# Altium PCB Routed BOARD 3.pcbdoc (part 5 of 7)
Units mil, origin at the board's own origin, x right, y up, seen from the top; angles counter-clockwise.
Board outline 6225 x 7025 mil, 8 copper layers (TopLayer, MidLayer1, MidLayer2, MidLayer3, MidLayer4, MidLayer5, MidLayer6, BottomLayer); 253 components, 548 nets, 2588 pads, 2014 vias.
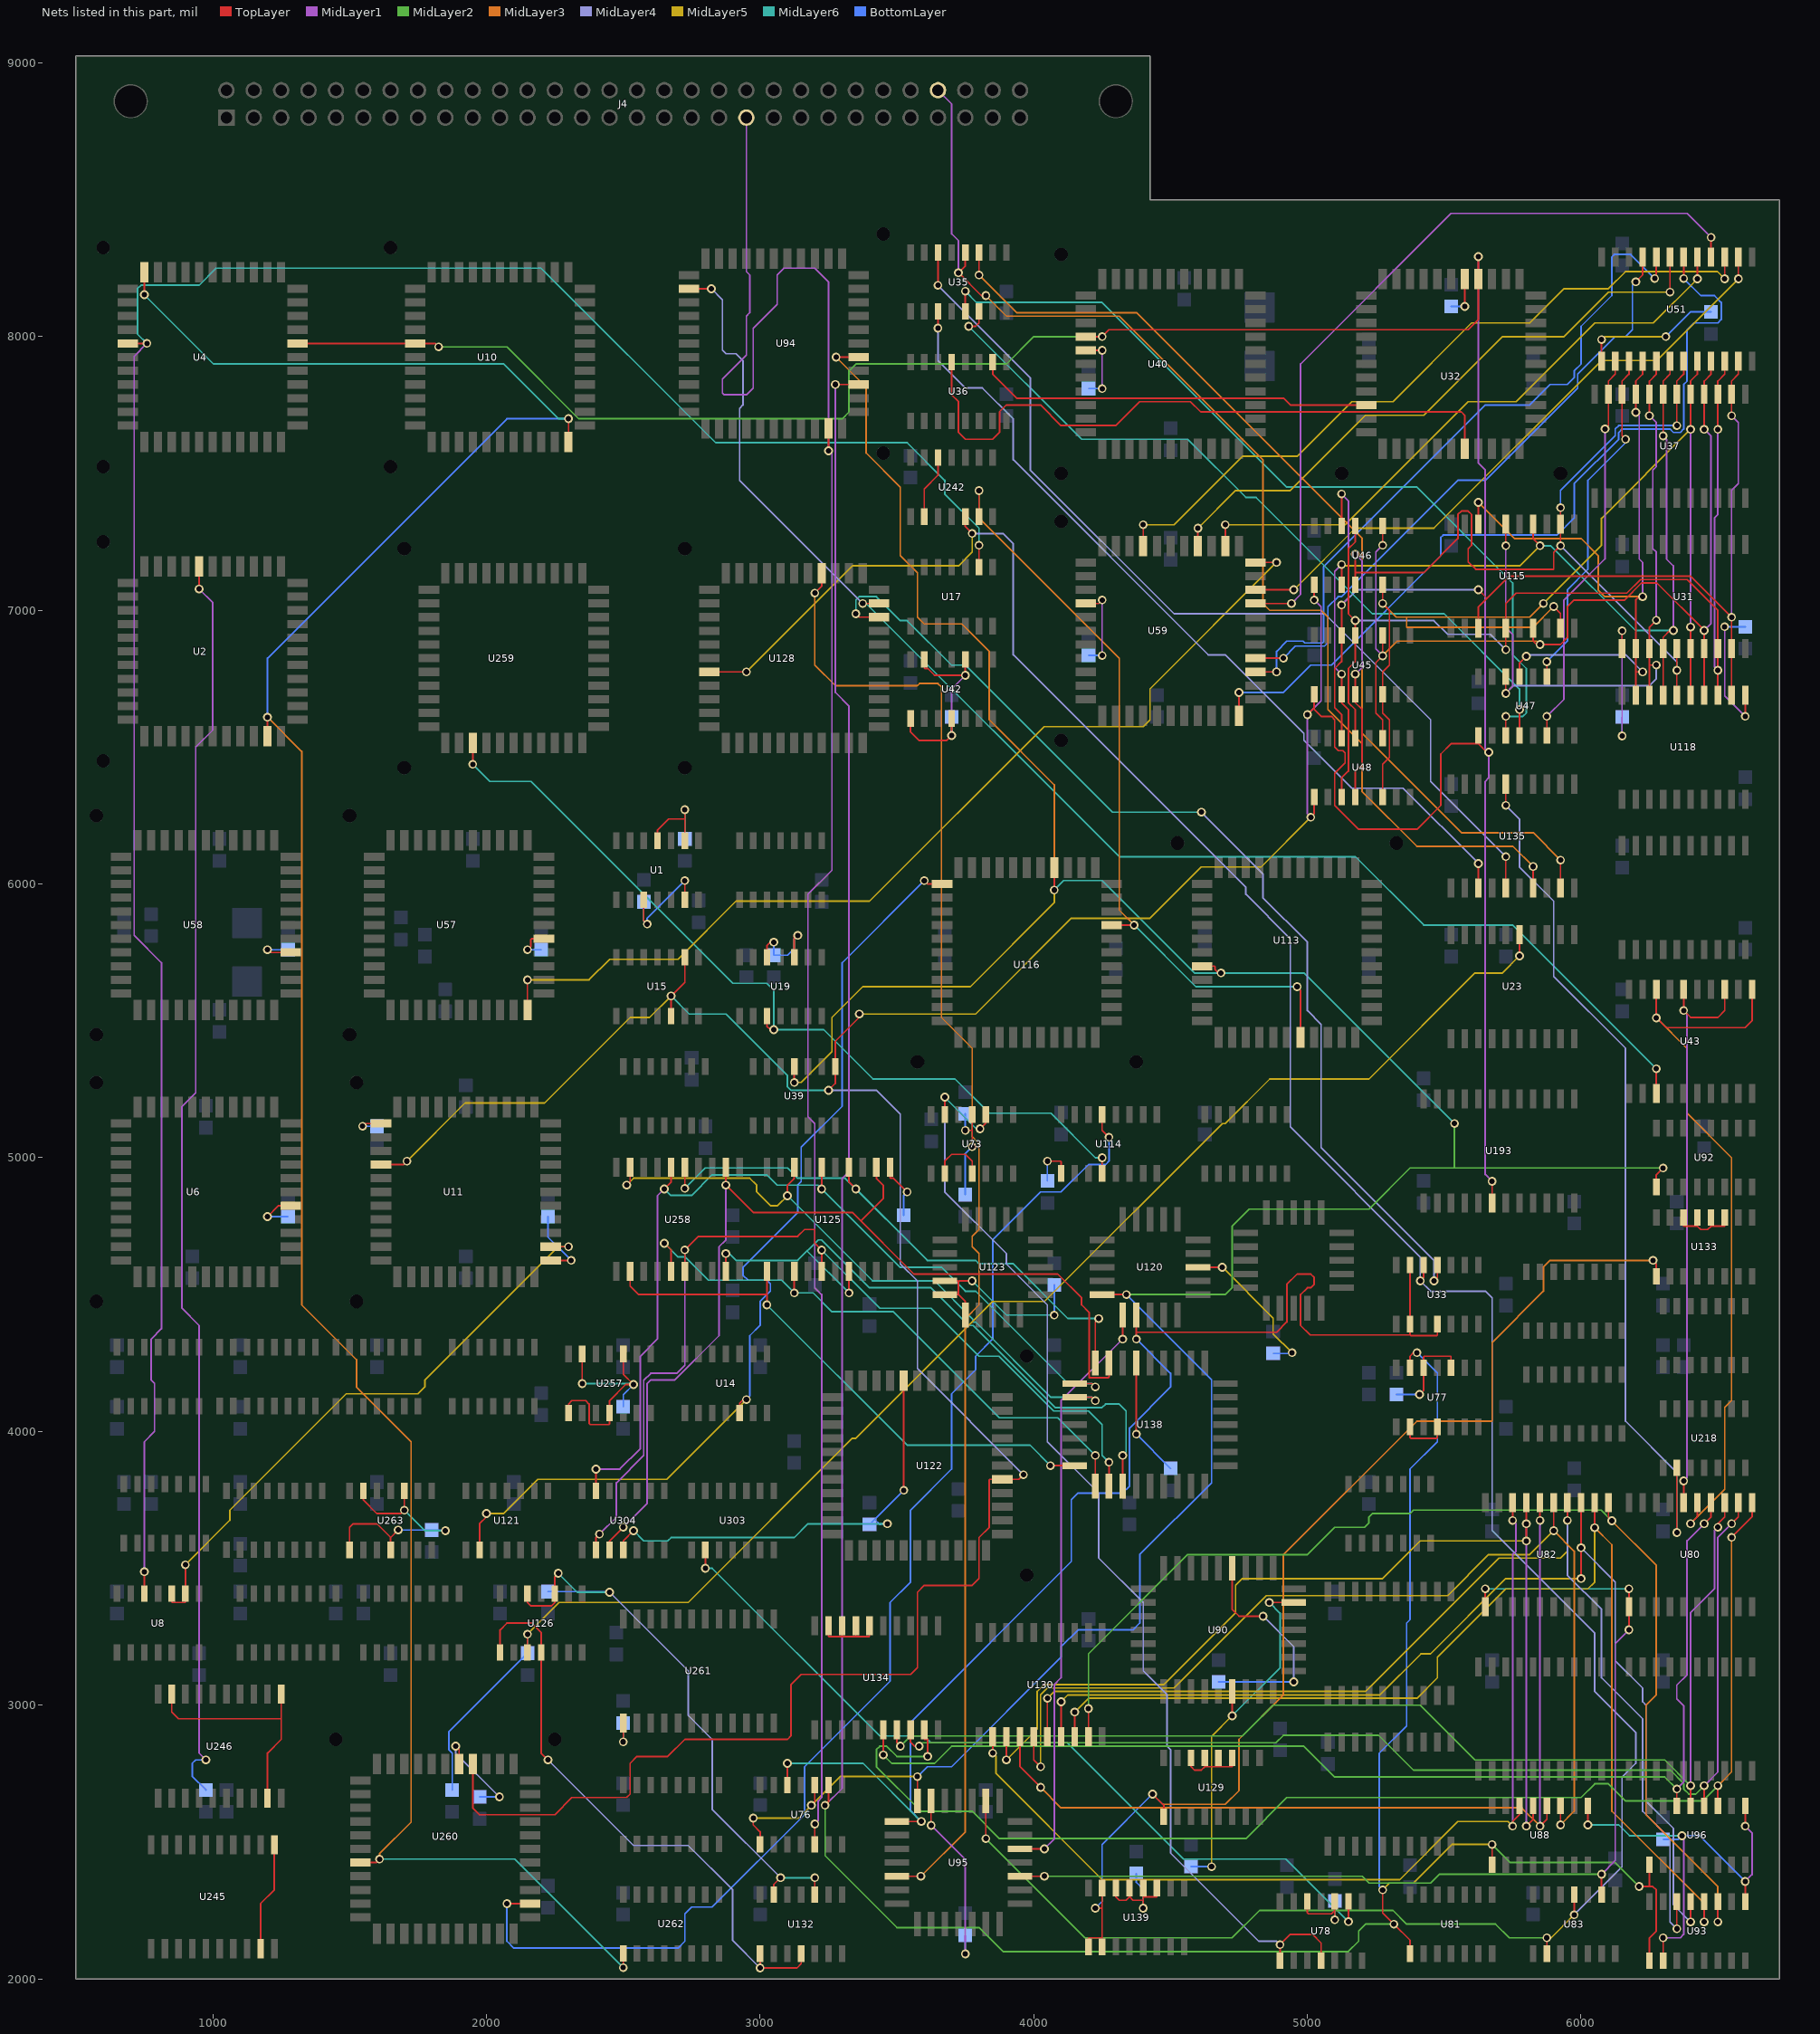
[diagram p11: the nets of this part, all layers, seen from the top]

## Via types
v1: diameter 32, hole 20, TopLayer to BottomLayer, 2014 vias

## Nets (pads, with @x,y where several pads share a name; then routed paths per layer and width w, separated by ;. In a path a pad name is that pad's centre, name@x,y a point inside that pad or via, vN(x,y) a via of type N, cw(c..) or ccw(c..) an arc to the next point about the centre after c; other vN are vias at no path point) (continued)
N47: U4.13 U10.33 U11.32 U15.5 U15.9 U32.10 U39.1 U40.32 U45.1 U46.1 U47.1 U48.1 U122.33 U193.18 U260.32 | length 21048
  TopLayer w6: U4.13@1310,7975 U10.33@1740,7975 1813,7975 v1(1825.5,7962.5) ; U11.32@1615,4975 1697,4975 v1(1709.5,4987.5) ; U260.32@1950,2785 1950,2625 1975,2600 2250,2600 2312.5,2662.5 2512.5,2662.5 2525,2675 2525,2787.5 2550,2812.5 2662.5,2812.5 2725,2875 3100,2875 3112.5,2887.5 3112.5,3075 3150,3112.5 3550,3112.5 3575,3137.5 3575,3412.5 3600,3437.5 3775,3437.5 3800,3462.5 3800,3612.5 3837.5,3650 3837.5,3822.5 3840,3825 U122.33@3885,3825 3945.5,3825 v1(3962.5,3842) ; U15.9@2725,5733 2725,5641 v1(2675,5591) ; v1(3362.5,5525) 3362.5,5512.5 3275,5425 U39.1@3275,5333 ; v1(5025,7037.5) U46.1@5025,7093 ; v1(5625,8292) U32.10@5625,8210 5625,8062.5 5587.5,8025 4275,8025 v1(4250,8000) ; U193.18@5675,4835 v1(5675,4914) ; U15.5@2675,5517 v1(2675,5591) ; U15.5@2675,5517 v1(2675,5591) ; U15.5@2675,5517 v1(2675,5591) ; 3275,5271.5 U39.1@3275,5333 ; 3275,5271.5 v1(3250,5246.5) 3275,5271.5 ; 3275,5271.5 U39.1@3275,5333 ; v1(4250,8000) U40.32@4190,8000 v1(4250,8000) ; 5025,6256.5 v1(5012.5,6244) 5025,6256.5 ; 5025,6256.5 U48.1@5025,6318 5025,6256.5 ; 5025,6644 U45.1@5025,6693 ; 5025,6644 5021.75,6640.75 5050,6612.5 5087.5,6612.5 5100,6600 5100,6500 5112.5,6487.5 5129,6487.5 5137.5,6479 5137.5,6442.5 5100,6405 5100,6287.5 5187.5,6200 5400,6200 5487.5,6287.5 5487.5,6475 5525,6512.5 5625,6512.5 ; 5025,6644 U45.1@5025,6693 ; 5025,6644 v1(5000,6619) 5025,6644 ; 5025,6644 U45.1@5025,6693 ; 5625,6512.5 U47.1@5625,6543 ; 5625,6512.5 v1@5656,6481.5 ; 5625,6512.5 U47.1@5625,6543 ; 5625,6512.5 U47.1@5625,6543 ; 5625,6512.5 v1@5656,6481.5 ; v1@5656,6481.5 v1(5662.5,6481.5) v1@5656,6481.5
  MidLayer1 w6: v1(5012.5,6244) 5000,6256.5 v1(5000,6619) 5050,6669 5050,7012.5 v1(5025,7037.5) ; v1(5625,8292) 5625,7537.5 5650,7512.5 5650,6494 v1(5662.5,6481.5) 5662.5,6387.5 5650,6375 5650,4939 v1(5675,4914)
  MidLayer2 w6: v1(1825.5,7962.5) 2075,7962.5 2337.5,7700 3300,7700 3325,7725 3325,7875 3350,7900 3900,7900 4000,8000 v1(4250,8000)
  MidLayer4 w6: v1(3250,5246.5) 3425,5246.5 3512.5,5159 3512.5,4612.5 3575,4550 3575,4229.5 v1(3962.5,3842)
  MidLayer5 w6: v1(1709.5,4987.5) 1922,5200 2212.5,5200 2525,5512.5 2596.5,5512.5 v1(2675,5591) ; v1(3362.5,5525) 3787.5,5525 4137.5,5875 4425,5875 4612.5,6062.5 4831,6062.5 v1(5012.5,6244)
  MidLayer6 w6: v1(2675,5591) 2741,5525 2875,5525 3100,5300 3100,5259 3112.5,5246.5 v1(3250,5246.5)
  other v1: 3250,5246.5 2675,5591 5012.5,6244 5662.5,6481.5 5000,6619
N48: U95.23 U120.4 | length 2157.5
  TopLayer w6: U95.23@3950,2475 v1(4039,2475) ; v1(4325,4337.5) U120.4@4325,4425
  MidLayer1 w6: v1(4039,2475) 4075,2511 4075,3075 4100,3100 4100,4112.5 v1(4325,4337.5)
N55: U242.2 U242.12 | length 236.7
  TopLayer w6: U242.2@3600,7342 3600,7443.5 3650,7493.5 U242.12@3650,7558
N57: J4.39 U76.5 U94.27 | length 7789.9
  TopLayer w6: U76.5@3200,2492 v1(3200,2566) ; v1(3250,7583) U94.27@3250,7665 v1(3250,7583)
  MidLayer1 w6: J4.39@2950,8800 2950,8237.5 2962.5,8225 2962.5,8087.5 2950,8075 2950,7932.5 2862.5,7845 2862.5,7794 2869,7787.5 2950,7787.5 2975,7812.5 2975,8030 3062.5,8117.5 3062.5,8225 3087.5,8250 3200,8250 3250,8200 v1(3250,7583) 3262.5,7570.5 3262.5,6050 3175,5962.5 3175,5150 3200,5125 3200,4525 3225,4500 3225,2662.5 3212.5,2650 3212.5,2578.5 v1(3200,2566)
  other v1: 3250,7583
N66: U2.5 U4.28 U10.6 U260.2 U262.1 | length 9500
  TopLayer w6: v1(750,8153) U4.28@750,8235 ; v1(2500,2041) U262.1@2500,2093 ; 1597,2425 U260.2@1540,2425 1597,2425 ; 1597,2425 v1(1609.5,2437.5) 1597,2425 ; U2.5@1200,6540 v1(1200,6609.5) U2.5@1200,6540 ; U10.6@2300,7615 v1(2300,7700) U10.6@2300,7615
  MidLayer3 w6: v1(1200,6609.5) 1325,6484.5 1325,4462.5 1525,4262.5 1525,4162.5 1725,3962.5 1725,2572.5 1609.5,2457 v1(1609.5,2437.5)
  MidLayer6 w6: v1(750,8153) 1003,7900 2063.5,7900 2263.5,7700 v1(2300,7700) ; v1(1609.5,2437.5) 2103.5,2437.5 v1(2500,2041)
  BottomLayer w6: v1(1200,6609.5) 1200,6825 2075,7700 v1(2300,7700)
  other v1: 1609.5,2437.5 1200,6609.5 2300,7700
N82: U135.16 U218.9 | length 3229.9
  TopLayer w6: v1(5725,6287.5) U135.16@5725,6365 ; v1(6350,3630.5) U218.9@6350,3867
  MidLayer4 w6: v1(5725,6287.5) 5775,6237.5 5775,6062.5 5900,5937.5 5900,5662.5 6162.5,5400 6162.5,4037.5 6350,3850 v1(6350,3630.5)
N87: U57.6 U59.17 | length 3621.9
  TopLayer w6: U57.6@2150,5540 v1(2150,5650) ; U59.17@4810,7175 v1(4887,7175)
  MidLayer5 w6: v1(2150,5650) 2375,5650 2450,5725 2700,5725 2912.5,5937.5 3400,5937.5 4037.5,6575 4400,6575 4425,6600 4425,6713 v1(4887,7175)
N88: U114.13 U260.19 | length 4690.6
  TopLayer w6: v1(2075,2275) U260.19@2160,2275 ; U114.13@4250,5158 4250,5100 v1(4275,5075)
  BottomLayer w6: v1(2075,2275) 2075,2137.5 2100,2112.5 2700,2112.5 2725,2137.5 2725,2237.5 2750,2262.5 2825,2262.5 3162.5,2600 3162.5,2775 3475,3087.5 3475,3375 3550,3450 3550,3712.5 3700,3862.5 3700,4137.5 3787.5,4225 3787.5,4275 3850,4337.5 3850,4700 4025,4875 4100,4875 4200,4975 4262.5,4975 4275,4987.5 v1(4275,5075)
N90: U39.4 U76.1 U76.10 U92.1 U94.33 U95.4 U113.2 U116.10 U120.3 | length 14025.8
  TopLayer w6: v1(2975,2587.5) 2975,2562.5 3000,2537.5 U76.1@3000,2492 ; v1(3125,5275) U39.4@3125,5333 ; v1(3278,7925) U94.33@3360,7925 ; U92.1@6275,4893 6275,4937.5 v1(6300,4962.5) ; 3200,2646.5 U76.10@3200,2708 3200,2646.5 ; 3200,2646.5 v1(3187.5,2634) 3200,2646.5 ; v1(4075,5978) U116.10@4075,6060 ; v1(4075,5978) U116.10@4075,6060 ; v1(4075,5978) U116.10@4075,6060 ; U120.3@4250,4500 v1(4339,4500) ; U120.3@4250,4500 v1(4339,4500) ; U120.3@4250,4500 v1(4339,4500) ; 4660,5700 4662.5,5697.5 ; 4660,5700 U113.2@4615,5700 4660,5700 ; 4660,5700 4662.5,5697.5 ; 4662.5,5687.5 v1@4675,5675 ; 4662.5,5687.5 4662.5,5697.5 ; 4662.5,5687.5 v1@4675,5675 ; 4662.5,5687.5 4662.5,5697.5 ; v1@4675,5675 v1(4684.5,5675) v1@4675,5675 ; U95.4@3575,2650 v1(3575,2739) U95.4@3575,2650
  MidLayer2 w6: v1(5537.5,5125) 5537.5,4962.5 5375,4962.5 ; v1(6300,4962.5) 5375,4962.5 ; 4700,4500 v1(4339,4500) 4700,4500 ; 4700,4500 4725,4525 ; 4700,4500 4725,4525 ; 4725,4525 4725,4750 ; 4725,4525 4725,4750 ; 4725,4750 4787.5,4812.5 ; 4725,4750 4787.5,4812.5 ; 4787.5,4812.5 5225,4812.5 ; 4787.5,4812.5 5225,4812.5 ; 5225,4812.5 5375,4962.5 ; 5225,4812.5 5375,4962.5
  MidLayer3 w6: v1(3278,7925) 3387.5,7815.5 3387.5,7575 3512.5,7450 3512.5,7200 3575,7137.5 3575,6975 3600,6950 3737.5,6950 3837.5,6850 3837.5,6600 4075,6362.5 v1(4075,5978)
  MidLayer5 w6: v1(2975,2587.5) 3141,2587.5 v1(3187.5,2634) 3292.5,2739 v1(3575,2739) ; v1(3125,5275) 3150,5275 3262.5,5387.5 3262.5,5512.5 3375,5625 3768,5625 4075,5932 v1(4075,5978)
  MidLayer6 w6: v1(4075,5978) 4109.5,6012.5 4250,6012.5 4587.5,5675 v1(4684.5,5675) 4987.5,5675 v1(5537.5,5125)
  BottomLayer w6: v1(3575,2739) 3611,2775 3700,2775 4100,3175 4100,3212.5 4162.5,3275 4362.5,3275 4387.5,3300 4387.5,3550 4650,3812.5 4650,4189 v1(4339,4500)
  other v1: 3187.5,2634 3575,2739 4339,4500 4339,4500 4684.5,5675 4075,5978 4075,5978
N91: U80.1 U82.1 U83.9 U95.21 | length 3971
  TopLayer w6: U95.21@3950,2375 v1(4039,2375) ; U82.1@5650,3360 v1(5650,3425) ; v1(6175,3275) U80.1@6175,3360 v1(6175,3425) ; U83.9@6075,2308 v1(6075,2382) U83.9@6075,2308
  MidLayer1 w6: v1(6075,2382) 6125,2432 6125,3225 v1(6175,3275)
  MidLayer2 w6: v1(4039,2375) 5200,2375 5225,2350 5450,2350 5482,2382 v1(6075,2382)
  MidLayer6 w6: v1(5650,3425) v1(6175,3425)
  other v1: 6075,2382
N92: U76.9 U77.13 U81.1 U88.9 U93.9 U94.31 U96.9 | length 12734.3
  TopLayer w6: v1(3275,7825) U94.31@3360,7825 ; v1(5316,2200) 5375,2141 ; U77.13@5375,4233 5375,4274.5 5388,4287.5 v1(5400.5,4287.5) ; v1(6212.5,2337.5) 6262.5,2337.5 ; U96.9@6250,2417 6250,2337.5 6262.5,2337.5 ; 3250,2646.5 U76.9@3250,2708 3250,2646.5 ; 3250,2646.5 v1(3237.5,2634) 3250,2646.5 ; 5275,2241 v1(5275,2325) 5275,2241 ; 5275,2241 5375,2141 ; 5275,2241 5375,2141 ; U81.1@5375,2092 5375,2141 ; U81.1@5375,2092 5375,2141 ; U81.1@5375,2092 5375,2141 ; 6250,2150 U93.9@6250,2067 6250,2150 ; 6250,2150 6275,2175 ; 6250,2150 6275,2175 ; 6262.5,2337.5 6275,2325 ; 6262.5,2337.5 6275,2325 ; 6275,2175 6275,2325 ; 6275,2175 6275,2325 ; U88.9@5675,2417 v1(5675,2491) U88.9@5675,2417
  MidLayer1 w6: v1(3237.5,2634) 3300,2696.5 3300,4925 3325,4950 3325,6650 3275,6700 v1(3275,7825)
  MidLayer2 w6: v1(3237.5,2634) 3237.5,2450 3500,2187.5 3800,2187.5 3887.5,2100 5150,2100 5187.5,2137.5 5187.5,2175 5212.5,2200 v1(5316,2200) ; v1(5675,2491) 5741,2425 6125,2425 v1(6212.5,2337.5)
  MidLayer5 w6: v1(5275,2325) 5300,2350 5387.5,2350 5528.5,2491 v1(5675,2491)
  BottomLayer w6: v1(5275,2325) 5262.5,2337.5 5262.5,2824.5 5362.5,2924.5 5362.5,3300 5375,3312.5 5375,3862.5 5475,3962.5 5475,4213 v1(5400.5,4287.5)
  other v1: 5275,2325 5675,2491 3237.5,2634
N95: U19.3 U114.4 U259.42 | length 3247.9
  TopLayer w6: v1(1950,6437.5) U259.42@1950,6515 ; U114.4@4250,4943 v1(4250,5000) ; 3025,5480.5 v1@3037.5,5468 ; 3025,5480.5 U19.3@3025,5517 3025,5480.5 ; 3025,5480.5 v1@3037.5,5468 ; v1@3037.5,5468 v1(3050,5468) v1@3037.5,5468
  MidLayer6 w6: v1(1950,6437.5) 2012.5,6375 2162.5,6375 2900,5637.5 3025,5637.5 3050,5612.5 v1(3050,5468) 3232,5468 3412.5,5287.5 3712.5,5287.5 3837.5,5162.5 4062.5,5162.5 4225,5000 v1(4250,5000)
  other v1: 3050,5468
N102: R23.2 R31.2 U23.15 U126.3 | length 5558.4
  TopLayer w6: U126.3@2150,3192 v1(2150,3259) ; v1(5775,5737.5) U23.15@5775,5815
  MidLayer5 w6: v1(2150,3259) 2266,3375 2737.5,3375 3337.5,3975 3350,3975 3850,4475 4039,4475 4689,5125 4700,5125 4862.5,5287.5 5225,5287.5 5612.5,5675 5712.5,5675 v1(5775,5737.5)
  BottomLayer w6: R31.2@1875,2690 1875,2825 1862.5,2837.5 1862.5,2902.5 R23.2@2150,3190 ; R23.2@2150,3190 v1(2150,3259) R23.2@2150,3190
  other v1: 2150,3259
N111: R43.2 R49.2 U73.11 | length 446.4
  TopLayer w6: v1(3750,5100) 3775,5100 U73.11@3775,5158 v1(3775,5040)
  BottomLayer w6: R49.2@3750,4865 3750,5015 v1(3775,5040) ; v1(3750,5100) R43.2@3750,5160
ORIGRQ: U78.9 U303.2 | length 3025.7
  TopLayer w6: v1(2800,3500) U303.2@2800,3567 ; v1(5150,2209) U78.9@5150,2283
  MidLayer6 w6: v1(2800,3500) 2825,3500 3437.5,2887.5 3600,2887.5 3625,2862.5 4122.5,2862.5 4547.5,2437.5 4921.5,2437.5 v1(5150,2209)
ORQ: U4.33 U8.12 U17.9 | length 8688.3
  TopLayer w6: U8.12@750,3408 v1(750,3487.5) ; U17.9@3800,7158 v1(3800,7237.5) ; U4.33@690,7975 v1(759.5,7975) U4.33@690,7975
  MidLayer1 w6: v1(750,3487.5) 750,3962.5 787.5,4000 787.5,4175 775,4187.5 775,4337.5 812.5,4375 812.5,5712.5 712.5,5812.5 712.5,7928 v1(759.5,7975)
  MidLayer6 w6: v1(759.5,7975) 725,8009.5 725,8175 737.5,8187.5 950,8187.5 1012.5,8250 2200,8250 2837.5,7612.5 3537.5,7612.5 3675,7475 3675,7425 3800,7300 v1(3800,7237.5)
  other v1: 759.5,7975
OWN: U43.3 U94.8 U128.16 | length 5307.5
  TopLayer w6: U94.8@2740,8175 v1(2822,8175) ; U43.3@6275,5235 v1(6275,5325) ; v1(3375,7025) U128.16@3435,7025 v1(3375,7025)
  MidLayer4 w6: v1(2822,8175) 2862.5,8134.5 2862.5,7950 2875,7937.5 2912.5,7937.5 2937.5,7912.5 2937.5,7750 2925,7737.5 2925,7475 v1(3375,7025)
  MidLayer6 w6: v1(3375,7025) 3387.5,7025 4312.5,6100 5175,6100 5425,5850 5750,5850 v1(6275,5325)
  other v1: 3375,7025
PARMNXT: U32.35 U36.5 | length 2433.9
  TopLayer w6: U36.5@3700,7907 3700,7787.5 3725,7762.5 3725,7650 3750,7625 3850,7625 3875,7650 3875,7725 3900,7750 4025,7750 4100,7675 4300,7675 4387.5,7762.5 4572.5,7762.5 4610,7725 5562.5,7725 5575,7712.5 U32.35@5575,7590
PARMST: U32.26 U36.2 | length 1456.1
  TopLayer w6: U36.2@3850,7907 3850,7862.5 3937.5,7775 4912.5,7775 4937.5,7750 U32.26@5215,7750
PERDY: U33.2 U33.4 U33.13 U76.12 U95.5 U120.5 | length 5181.5
  TopLayer w6: U76.12@3100,2708 v1(3100,2787.5) ; v1(4375,4337.5) U120.5@4375,4425 4375,4362.5 4887.5,4362.5 4925,4400 4925,4537.5 4962.5,4575 5012.5,4575 5025,4562.5 5025,4537.5 5012.5,4525 5000,4525 4975,4500 4975,4387.5 5010,4352.5 5375,4352.5 ; U33.13@5375,4608 U33.2@5375,4392 ; U33.4@5475,4392 5475,4352.5 5472.5,4350 5377.5,4350 5375,4352.5 ; 5375,4352.5 U33.2@5375,4392 ; 5375,4352.5 U33.2@5375,4392 ; U95.5@3500,2575 v1(3589,2575) U95.5@3500,2575
  MidLayer6 w6: v1(3100,2787.5) 3376.5,2787.5 v1(3589,2575)
  BottomLayer w6: v1(3589,2575) 3550,2614 3550,2937.5 4137.5,3525 4137.5,3750 4162.5,3775 4325,3775 4350,3800 4350,4012.5 4500,4162.5 4500,4212.5 v1(4375,4337.5)
  other v1: 3589,2575
PIG: U14.5 U116.18 U121.2 | length 3758.3
  TopLayer w6: U121.2@1975,3567 1975,3662.5 2000,3687.5 v1(2000,3700) ; v1(3600,6012.5) 3612.5,6000 U116.18@3665,6000 ; 2925,4103.5 v1@2938,4116.5 ; 2925,4103.5 U14.5@2925,4067 2925,4103.5 ; 2925,4103.5 v1@2938,4116.5 ; v1@2938,4116.5 v1(2950,4116.5) v1@2938,4116.5
  MidLayer5 w6: v1(2000,3700) 2062.5,3700 2187.5,3825 2658.5,3825 v1(2950,4116.5)
  BottomLayer w6: v1(2950,4116.5) 2962.5,4129 2962.5,4350 3000,4387.5 3000,4475 3037.5,4512.5 3037.5,4540 3025,4552.5 2956,4552.5 2937.5,4571 2937.5,4599 3137.5,4799 3137.5,4900 3150,4912.5 3150,5038.5 3300,5188.5 3300,5712.5 v1(3600,6012.5)
  other v1: 2950,4116.5
PSD0: U31.9 U37.14 U45.14 U46.14 U48.14 U51.11 U115.3 U118.2 | length 4328.1
  TopLayer w6: U48.14@5125,6533 5125,6619.5 5100,6644.5 5100,6787.5 5125,6812.5 U45.14@5125,6908 ; U46.14@5125,7308 v1(5125,7425) ; v1(5625,7075) 5656.25,7043.75 5625,7012.5 ; U118.2@6550,6690 U31.9@6550,6860 ; v1(6550,7711) U37.14@6550,7790 6550,7837.5 6575,7862.5 U51.11@6575,7910 ; U45.14@5125,6908 v1(5125,7019.5) U45.14@5125,6908 ; 5625,7012.5 U115.3@5625,6935 5625,7012.5 ; 5625,7012.5 5737.5,7125 6400,7125 v1(6550,6975) ; U31.9@6550,6860 v1(6550,6975) ; U31.9@6550,6860 v1(6550,6975)
  MidLayer1 w6: v1(5125,7019.5) 5150,7044.5 5150,7400 v1(5125,7425) ; v1(6550,6975) 6550,7437.5 6575,7462.5 6575,7686 v1(6550,7711)
  MidLayer4 w6: v1(5125,7019.5) 5180.5,7075 v1(5625,7075)
  other v1: 5125,7019.5
PSD1: U31.8 U37.15 U45.13 U46.13 U48.13 U51.10 U115.5 U118.3 | length 4030.6
  TopLayer w6: U48.13@5175,6533 5175,6637.5 5150,6662.5 5150,6787.5 5175,6812.5 U45.13@5175,6908 ; U46.13@5175,7308 5175,7250 5150,7225 5150,6987.5 v1(5175,6962.5) ; v1(5725,6856) U115.5@5725,6935 5725,7025 5762.5,7062.5 6167,7062.5 6217,7112.5 6387.5,7112.5 6500,7000 U31.8@6500,6860 ; U118.3@6500,6690 U31.8@6500,6860 ; v1(6500,6781) U31.8@6500,6860 ; v1(6500,7661) U37.15@6500,7790 6500,7837.5 6525,7862.5 U51.10@6525,7910 ; U45.13@5175,6908 v1(5175,6962.5) ; U45.13@5175,6908 v1(5175,6962.5)
  MidLayer1 w6: v1(6500,6781) 6487.5,6793.5 6487.5,7337.5 6500,7350 v1(6500,7661)
  MidLayer4 w6: v1(5175,6962.5) 5462.5,6962.5 5512.5,6912.5 5668.5,6912.5 v1(5725,6856)
PSD2: U31.7 U37.16 U45.11 U46.11 U48.11 U51.9 U115.7 U118.4 | length 3944.6
  TopLayer w6: U48.11@5275,6533 5275,6600 5250,6625 5250,6809 v1(5275,6834) ; v1(5275,7237.5) U46.11@5275,7308 ; v1(5850,6875) v1@5837.5,6875 ; U118.4@6450,6690 U31.7@6450,6860 ; v1(6450,7661) U37.16@6450,7790 6450,7837.5 6475,7862.5 U51.9@6475,7910 ; v1(5275,6834) U45.11@5275,6908 ; v1(5275,6834) U45.11@5275,6908 ; v1(5275,6834) U45.11@5275,6908 ; 5825,6887.5 U115.7@5825,6935 5825,6887.5 ; 5825,6887.5 v1@5837.5,6875 ; 5825,6887.5 v1@5837.5,6875 ; v1@5837.5,6875 5925,6875 5950,6900 5950,7012.5 5975,7037.5 6159,7037.5 6221.5,7100 6276.5,7100 v1(6450,6926.5) ; U31.7@6450,6860 v1(6450,6926.5) ; U31.7@6450,6860 v1(6450,6926.5)
  MidLayer1 w6: v1(5275,6834) 5250,6859 5250,7212.5 v1(5275,7237.5) ; v1(6450,6926.5) 6475,6951.5 6475,7636 v1(6450,7661)
  MidLayer3 w6: v1(5275,6834) 5328.5,6887.5 5837.5,6887.5 v1(5850,6875)
  other v1: 5275,6834
PSD3: U31.6 U37.17 U45.6 U46.6 U48.6 U51.8 U115.9 U118.5 | length 4888.3
  TopLayer w6: U48.6@5275,6318 5275,6437.5 5300,6462.5 5300,6600 5275,6625 U45.6@5275,6693 ; v1(5900,7014) 5925,6989 U115.9@5925,6935 ; U118.5@6400,6690 U31.6@6400,6860 v1(6400,6939) ; U51.8@6425,7910 6425,7862.5 6400,7837.5 U37.17@6400,7790 ; U45.6@5275,6693 5275,6775 ; U45.6@5275,6693 5275,6775 ; 5275,6775 5300,6800 ; 5275,6775 5300,6800 ; v1(5275,7025) 5300,7000 ; v1(5275,7025) U46.6@5275,7093 v1(5275,7025) ; v1(5275,7025) 5300,7000 ; 5300,6800 5300,7000 ; 5300,6800 5300,7000 ; U37.17@6400,7790 v1(6400,7661) U37.17@6400,7790
  MidLayer1 w6: v1(6400,6939) v1(6400,7661)
  MidLayer3 w6: v1(5862.5,7025) 5812.5,6975 5325,6975 ; v1(5900,7014) 5823.5,6937.5 5362.5,6937.5 5362.5,6975 5325,6975 ; 5325,6975 v1(5275,7025) 5325,6975
  MidLayer5 w6: v1(5862.5,7025) 6075,7237.5 6075,7336 v1(6400,7661)
  other v1: 6400,7661
PSD4: U31.5 U37.18 U45.4 U46.4 U48.4 U51.7 U115.12 U118.6 | length 4200.4
  TopLayer w6: U48.4@5175,6318 5175,6412.5 5200,6437.5 5200,6637.5 5175,6662.5 U45.4@5175,6693 v1(5175,6767) ; v1(5175,7204.5) U46.4@5175,7093 5175,7137.5 5425,7137.5 5550,7262.5 5550,7350 5562.5,7362.5 5587.5,7362.5 5600,7350 5600,7237.5 5587.5,7225 5587.5,7177.5 5615,7150 5900,7150 5900,7211 v1(5925,7236) ; v1(5925,7375) U115.12@5925,7315 ; U118.6@6350,6690 U31.5@6350,6860 v1(6350,6781) ; v1(6350,7675) U37.18@6350,7790 6350,7837.5 6375,7862.5 U51.7@6375,7910 ; v1(5925,7236) U115.12@5925,7315 ; v1(5925,7236) U115.12@5925,7315
  MidLayer1 w6: v1(5175,6767) 5200,6792 5200,7179.5 v1(5175,7204.5)
  MidLayer4 w6: v1(5925,7236) 6350,6811 v1(6350,6781)
  BottomLayer w6: v1(5925,7375) 5925,7437.5 6125,7637.5 6125,7662.5 6137.5,7675 v1(6350,7675)
PSD5: U31.4 U37.19 U45.3 U46.3 U48.3 U51.6 U115.14 U118.7 | length 3948.2
  TopLayer w6: U48.3@5125,6318 5125,6387.5 5150,6412.5 5150,6637.5 5125,6662.5 U45.3@5125,6693 v1(5125,6767) ; U118.7@6300,6690 U31.4@6300,6860 ; v1(6300,7637.5) U37.19@6300,7790 6300,7837.5 6325,7862.5 U51.6@6325,7910 ; 5825,7261 v1(5850,7236) 5825,7261 ; 5825,7261 U115.14@5825,7315 5825,7261 ; U31.4@6300,6860 6300,6901.5 ; U31.4@6300,6860 6300,6901.5 ; 6300,6901.5 v1@6325,6926.5 ; 6300,6901.5 v1@6325,6926.5 ; v1@6325,6926.5 v1(6337.5,6926.5) v1@6325,6926.5 ; U46.3@5125,7093 v1(5125,7167) U46.3@5125,7093
  MidLayer1 w6: v1(5125,6767) 5100,6792 5100,7142 v1(5125,7167) ; v1(6300,7637.5) 6312.5,7625 6312.5,7187.5 6337.5,7162.5 v1(6337.5,6926.5)
  MidLayer5 w6: v1(5125,7167) 5129.5,7162.5 5776.5,7162.5 v1(5850,7236)
  MidLayer6 w6: v1(5850,7236) 5889,7236 6198.5,6926.5 v1(6337.5,6926.5)
  other v1: 6337.5,6926.5 5125,7167 5850,7236
PSD6: U31.3 U37.20 U47.14 U51.5 U115.16 U118.8 | length 2730.8
  TopLayer w6: v1(5725,7236) U115.16@5725,7315 ; U118.8@6250,6690 U31.3@6250,6860 ; v1(6250,7711) U37.20@6250,7790 6250,7837.5 6275,7862.5 U51.5@6275,7910 ; v1(6275,6800) 6250,6800 U31.3@6250,6860 ; v1(6275,6964) 6250,6939 U31.3@6250,6860 ; v1(5725,6696.5) U47.14@5725,6758 v1(5725,6696.5)
  MidLayer1 w6: v1(5725,6696.5) 5750,6721.5 5750,6912.5 5725,6937.5 v1(5725,7236) ; v1(6250,7711) 6275,7686 6275,7525 6262.5,7512.5 6262.5,7225 6275,7212.5 v1(6275,6964)
  MidLayer4 w6: v1(5725,6696.5) 5753.5,6725 6250,6725 6275,6750 v1(6275,6800)
  other v1: 5725,6696.5
PSD7: U31.2 U37.21 U47.13 U51.4 U115.18 U118.9 | length 3008.3
  TopLayer w6: U115.18@5625,7315 v1(5625,7394) ; U47.13@5775,6758 5775,6807 v1(5800,6832) ; v1(6200,7723.5) U37.21@6200,7790 6200,7837.5 6225,7862.5 U51.4@6225,7910 ; v1(6225,6775) 6200,6775 U118.9@6200,6690 U31.2@6200,6860 ; U31.2@6200,6860 6200,7037.5 ; U31.2@6200,6860 6200,7037.5 ; 6200,7037.5 v1@6212.5,7050 ; 6200,7037.5 v1@6212.5,7050 ; v1@6212.5,7050 v1(6225,7050) v1@6212.5,7050
  MidLayer1 w6: v1(6200,7723.5) 6212.5,7711 6212.5,7187.5 6225,7175 v1(6225,7050)
  MidLayer3 w6: v1(5625,7394) 5756.5,7262.5 6000,7262.5 6062.5,7200 6062.5,7075 6087.5,7050 v1(6225,7050)
  MidLayer4 w6: v1(5800,6832) 5805.5,6837.5 6162.5,6837.5 v1(6225,6775)
  other v1: 6225,7050
PSD8: U37.22 U47.11 U51.3 | length 1286.6
  TopLayer w6: U47.11@5875,6758 v1(5875,6812.5) ; v1(6162.5,7625) 6150,7637.5 U37.22@6150,7790 6150,7837.5 6175,7862.5 U51.3@6175,7910
  BottomLayer w6: v1(5875,6812.5) 5950,6887.5 5950,7075 6025,7150 6025,7475 6162.5,7612.5 v1(6162.5,7625)
PSD9: U37.23 U47.6 U51.2 | length 1470.6
  TopLayer w6: U47.6@5875,6543 v1(5875,6612.5) ; v1(6087.5,7662.5) 6100,7675 U37.23@6100,7790 6100,7837.5 6125,7862.5 U51.2@6125,7910
  MidLayer1 w6: v1(5875,6612.5) 5937.5,6675 5937.5,7037.5 6087.5,7187.5 v1(6087.5,7662.5)
PSD10: U35.14 U47.4 | length 2815.5
  TopLayer w6: v1(3762.5,8037.5) 3787.5,8037.5 3800,8050 U35.14@3800,8092 ; U47.4@5775,6543 v1(5775,6637.5)
  MidLayer6 w6: v1(3762.5,8037.5) 4175,7625 4562.5,7625 4775,7412.5 4812.5,7412.5 5237.5,6987.5 5500,6987.5 5775,6712.5 v1(5775,6637.5)
PSD11: U35.13 U47.3 | length 3160.9
  TopLayer w6: U35.13@3750,8092 v1(3750,8166) ; U47.3@5725,6543 v1(5725,6612.5)
  MidLayer6 w6: v1(3750,8166) 3791,8125 4250,8125 4925,7450 5400,7450 5750,7100 5750,6837.5 5800,6787.5 5800,6625 5787.5,6612.5 v1(5725,6612.5)
PSD12: U35.11 U135.3 | length 3108.1
  TopLayer w6: v1(3650,8031) U35.11@3650,8092 ; U135.3@5625,5985 v1(5625,6075)
  MidLayer4 w6: v1(3650,8031) 3650,7912.5 3750,7812.5 3812.5,7812.5 3925,7700 3925,7550 4637.5,6837.5 4700,6837.5 4987.5,6550 4987.5,6525 5162.5,6350 5350,6350 v1(5625,6075)
PSD13: U35.6 U135.5 | length 3504
  TopLayer w6: v1(3650,8187.5) U35.6@3650,8307 ; U135.5@5725,5985 v1(5725,6100)
  MidLayer4 w6: v1(3650,8187.5) 3987.5,7850 3987.5,7512.5 4512.5,6987.5 5063,6987.5 5450,6600.5 5450,6375 v1(5725,6100)
PSD14: J4.54 U35.4 U135.7 | length 4552
  TopLayer w6: v1(3825,8150) 3808,8150 v1(3725,8233) ; U135.7@5825,5985 v1(5825,6064) ; v1(3725,8233) 3750,8258 ; v1(3725,8233) 3750,8258 ; 3750,8258 U35.4@3750,8307 3750,8258
  MidLayer1 w6: J4.54@3650,8900 3700,8850 3700,8375 3725,8350 v1(3725,8233)
  MidLayer3 w6: v1(3825,8150) 3900,8075 4312.5,8075 4837.5,7550 4837.5,7025 4862.5,7000 5050,7000 5075,6975 5075,6637.5 5200,6512.5 5200,6337.5 5400,6137.5 5751.5,6137.5 v1(5825,6064)
PSD15: U35.3 U135.9 | length 3612.3
  TopLayer w6: v1(3800,8225) U35.3@3800,8307 ; U135.9@5925,5985 v1(5925,6087.5)
  MidLayer3 w6: v1(3800,8225) 3937.5,8087.5 4375,8087.5 5200,7262.5 5200,6550 5562.5,6187.5 5825,6187.5 v1(5925,6087.5)
PUD8_4: U245.1 U245.19 | length 400.7
  TopLayer w6: U245.19@1175,2110 1175,2275 1225,2325 U245.1@1225,2490
PUD8_5: U246.1 U246.9 U246.19 | length 966.1
  TopLayer w6: U246.9@850,3040 850,2975 875,2950 1250,2950 U246.1@1250,3040 1250,2875 1200,2825 U246.19@1200,2660
PUD9_1: R289.2 U261.1 | length 138
  TopLayer w6: v1(2500,2866) U261.1@2500,2935
  BottomLayer w6: v1(2500,2866) R289.2@2500,2935
PUD9_2: R288.2 U260.33 | length 394
  TopLayer w6: v1(1887.5,2850) 1900,2837.5 U260.33@1900,2785
  MidLayer4 w6: v1(1887.5,2850) 1887.5,2825 v1(2047.5,2665)
  BottomLayer w6: R288.2@1975,2665 v1(2047.5,2665)
PUD10_2: R12.2 U11.29 | length 124.1
  TopLayer w6: v1(1547.5,5115) 1557.5,5125 U11.29@1615,5125
  BottomLayer w6: v1(1547.5,5115) R12.2@1600,5115
PUD10_3: R11.2 U11.7 | length 270.2
  TopLayer w6: U11.7@2235,4625 v1(2310,4625)
  BottomLayer w6: R11.2@2225,4785 2225,4710 v1(2310,4625)
PUD10_4: R10.2 U2.24 | length 4636.9
  TopLayer w6: v1(950,7078) U2.24@950,7160
  MidLayer1 w6: v1(950,7078) 1000,7028 1000,6562.5 937.5,6500 937.5,5237.5 887.5,5187.5 887.5,4450 950,4387.5 950,2825 v1(975,2800)
  BottomLayer w6: R10.2@975,2690 925,2740 925,2787.5 937.5,2800 v1(975,2800)
PUD10_5: R9.2 U6.11 | length 176.6
  TopLayer w6: v1(1200,4785) 1240,4825 U6.11@1285,4825
  BottomLayer w6: v1(1200,4785) R9.2@1275,4785
PUD12_1: R62.2 U31.1 | length 518
  TopLayer w6: U31.1@6150,6860 v1(6150,6925)
  MidLayer1 w6: v1(6150,6541) v1(6150,6925)
  BottomLayer w6: v1(6150,6541) R62.2@6150,6610
PUD12_2: R63.2 U32.11 | length 150
  TopLayer w6: v1(5575,8110) U32.11@5575,8210
  BottomLayer w6: R63.2@5525,8110 v1(5575,8110)
PUD12_3: R66.2 U40.33 | length 250
  TopLayer w6: U40.33@4190,7950 v1(4250,7950)
  MidLayer1 w6: v1(4250,7810) v1(4250,7950)
  BottomLayer w6: R66.2@4200,7810 v1(4250,7810)
PUD13_1: R67.2 U51.1 | length 520.8
  TopLayer w6: U51.1@6075,7910 v1(6075,7989)
  MidLayer5 w6: v1(6075,7989) 6086,8000 v1(6310,8000)
  BottomLayer w6: v1(6310,8000) 6400,8090 R67.2@6475,8090
PUD14_1: R75.2 U58.10 | length 164.1
  TopLayer w6: v1(1200,5760) 1210,5750 U58.10@1285,5750
  BottomLayer w6: v1(1200,5760) R75.2@1275,5760
PUD14_2: R76.2 U57.11 | length 141.2
  TopLayer w6: v1(2150,5760) 2162.5,5772.5 2162.5,5797.5 2165,5800 U57.11@2210,5800
  BottomLayer w6: v1(2150,5760) R76.2@2200,5760
PUD14_3: R77.2 U59.32 | length 317.7
  TopLayer w6: U59.32@4190,7025 4237.5,7025 v1(4250,7037.5)
  MidLayer1 w6: v1(4250,6835) v1(4250,7037.5)
  BottomLayer w6: R77.2@4200,6835 v1(4250,6835)
PUD15_1: R85.2 U90.8 | length 834.7
  TopLayer w6: U90.8@4725,3500 4725,3350 4750,3325 v1(4838,3325)
  MidLayer4 w6: v1(4838,3325) 4950,3213 v1(4950,3085)
  BottomLayer w6: R85.2@4675,3085 v1(4950,3085)
PUD15_2: R87.2 U88.1 U93.1 U93.10 U96.1 | length 1924.9
  TopLayer w6: v1(6025,2562.5) U88.1@6025,2632 ; U93.10@6300,2067 v1(6300,2150) ; v1(6600,2558) U96.1@6600,2632 ; U93.1@6600,2282 v1(6600,2356) U93.1@6600,2282
  MidLayer1 w6: v1(6300,2150) 6362.5,2150 6375,2162.5 6375,2517 v1(6369,2523) ; v1(6600,2356) 6625,2381 6625,2533 v1(6600,2558)
  MidLayer6 w6: v1(6025,2562.5) 6137.5,2562.5 6177,2523 v1(6369,2523)
  BottomLayer w6: v1(6600,2356) 6433,2523 v1(6369,2523) ; R87.2@6300,2510 6356.5,2510 ; R87.2@6300,2510 6356.5,2510 ; R87.2@6300,2510 6356.5,2510 ; 6356.5,2510 v1@6369,2522.5 ; 6356.5,2510 v1@6369,2522.5 ; 6356.5,2510 v1@6369,2522.5 ; v1@6369,2522.5 v1(6369,2523) ; v1@6369,2522.5 v1(6369,2523) ; v1@6369,2522.5 v1(6369,2523)
  other v1: 6600,2356 6369,2523
PUD15_4: R97.2 U95.3 | length 679.8
  TopLayer w6: v1(3625,2561) U95.3@3625,2650
  MidLayer1 w6: v1(3625,2561) 3750,2436 v1(3750,2091)
  BottomLayer w6: v1(3750,2091) R97.2@3750,2160
PUD17_1: R109.2 U120.11 | length 577.2
  TopLayer w6: U120.11@4600,4600 v1(4689,4600)
  MidLayer5 w6: v1(4689,4600) 4875,4414 4875,4356.5 v1(4944,4287.5)
  BottomLayer w6: R109.2@4875,4285 4941.5,4285 v1(4944,4287.5)
PUD17_3: R112.2 U118.1 | length 511.1
  TopLayer w6: v1(6600,6612.5) U118.1@6600,6690
  MidLayer1 w6: v1(6525,6940) 6525,6687.5 v1(6600,6612.5)
  BottomLayer w6: v1(6525,6940) R112.2@6600,6940
PUD18_2: R123.2 U123.17 U123.18 U123.19 | length 847.7
  TopLayer w6: U123.19@3750,4425 3750,4475 3725,4500 ; v1(3775,4550) 3727.5,4550 3725,4547.5 ; 3722.5,4550 U123.17@3675,4550 3722.5,4550 ; 3722.5,4550 3725,4547.5 ; 3722.5,4550 3725,4547.5 ; 3725,4500 3725,4547.5 ; 3725,4500 U123.18@3675,4500 3725,4500
  MidLayer6 w6: v1(3775,4550) 3900,4425 v1(4075,4425)
  BottomLayer w6: v1(4075,4425) R123.2@4075,4535
PUD18_3: R116.2 U125.1 | length 211.9
  TopLayer w6: U125.1@3475,4965 3475,4927.5 3477.5,4925 3487.5,4925 v1(3537.5,4875)
  BottomLayer w6: R116.2@3525,4790 3525,4862.5 v1(3537.5,4875)
PUD18_4: U133.3 U133.4 U133.5 U133.6 | length 352.4
  TopLayer w6: U133.6@6375,4782 6375,4750 6425,4750 ; U133.3@6525,4782 6525,4750 6475,4750 ; 6425,4750 U133.5@6425,4782 6425,4750 ; 6425,4750 6437.5,4737.5 6462.5,4737.5 6475,4750 ; 6475,4750 U133.4@6475,4782 6475,4750
PUD18_5: U129.3 U129.4 U129.5 U129.6 | length 352.4
  TopLayer w6: U129.6@4575,2807 4575,2775 4587.5,2762.5 4612.5,2762.5 4625,2775 ; U129.3@4725,2807 4725,2775 4675,2775 ; 4625,2775 U129.5@4625,2807 4625,2775 ; 4625,2775 4675,2775 ; 4675,2775 U129.4@4675,2807 4675,2775
PUD18_6: U134.6 U134.7 U134.8 U134.9 | length 391.2
  TopLayer w6: U134.9@3250,3290 3250,3252.5 3252.5,3250 3297.5,3250 ; U134.6@3400,3290 3400,3252.5 3397.5,3250 3347.5,3250 ; 3297.5,3250 3300,3252.5 ; 3297.5,3250 3347.5,3250 ; 3297.5,3250 3300,3252.5 ; 3300,3252.5 U134.8@3300,3290 3300,3252.5 ; 3347.5,3250 3350,3252.5 ; 3347.5,3250 3350,3252.5 ; 3350,3252.5 U134.7@3350,3290 3350,3252.5
PUD18_8: R121.2 U139.3 U139.4 U139.5 U139.6 | length 581.4
  TopLayer w6: U139.6@4300,2332 4300,2300 4312.5,2287.5 4337.5,2287.5 4350,2300 ; v1(4400,2258) U139.4@4400,2332 ; U139.3@4450,2332 4450,2300 4400,2300 U139.4@4400,2332 ; 4350,2300 4362.5,2287.5 4400,2287.5 U139.4@4400,2332 ; 4350,2300 U139.5@4350,2332 4350,2300
  BottomLayer w6: R121.2@4375,2385 4375,2352.5 4400,2327.5 v1(4400,2258)
PUD18_10: R115.2 U122.2 U304.4 | length 1713.3
  TopLayer w6: U304.4@2500,3567 2500,3600 v1(2537.5,3637.5) ; v1(3525,3785) U122.2@3525,4185
  MidLayer6 w6: v1(2537.5,3637.5) 2575,3600 2662.5,3600 2675,3612.5 3125,3612.5 3175,3662.5 v1(3465,3662.5)
  BottomLayer w6: v1(3465,3662.5) 3440,3662.5 3437.5,3660 3418.75,3678.75 R115.2@3400,3660 v1(3525,3785)
PUP10_1: R6.2 U1.2 U1.4 | length 455
  TopLayer w6: U1.4@2625,6158 2625,6196.5 2666,6237.5 2725,6237.5 U1.2@2725,6158 v1(2725,6271.5)
  BottomLayer w6: R6.2@2725,6165 v1(2725,6271.5)
PUP10_2: R7.2 U1.10 U1.13 | length 560.5
  TopLayer w6: U1.13@2725,5942 v1(2725,6012.5) ; 2575,5866 U1.10@2575,5942 2575,5866 ; 2575,5866 v1(2587.5,5853.5) 2575,5866
  BottomLayer w6: R7.2@2575,5935 2575,5866 v1(2587.5,5853.5) 2587.5,5875 v1(2725,6012.5)
  other v1: 2587.5,5853.5
PUP12_1: R60.2 U19.10 U19.12 | length 348.2
  TopLayer w6: U19.12@3025,5733 3025,5775 3037.5,5787.5 v1(3050,5787.5) ; U19.10@3125,5733 3125,5810 3127.5,5812.5 v1(3137.5,5812.5)
  BottomLayer w6: v1(3050,5787.5) R60.2@3050,5740 3100,5740 3125,5765 3125,5800 v1(3137.5,5812.5)
PUP12_3: R64.2 U42.1 U42.4 U42.10 U42.13 | length 1032.3
  TopLayer w6: U42.1@3550,6604.5 3550,6555 3580,6525 3682.5,6525 v1(3700,6542.5) U42.4@3700,6604.5 ; U42.13@3600,6820.5 3600,6790 3602.5,6787.5 3612.5,6787.5 3637.5,6762.5 v1(3750,6762.5) ; v1(3750,6762.5) U42.10@3750,6820.5 v1(3750,6762.5)
  MidLayer1 w6: v1(3700,6542.5) 3700,6712.5 v1(3750,6762.5)
  BottomLayer w6: v1(3700,6542.5) R64.2@3700,6610 ; v1(3700,6542.5) R64.2@3700,6610 ; v1(3700,6542.5) R64.2@3700,6610
  other v1: 3700,6542.5 3700,6542.5
PUP14_4: U73.2 U73.4 | length 211.7
  TopLayer w6: U73.2@3675,4942 3675,4987.5 3700,5012.5 3750,5012.5 3775,4987.5 U73.4@3775,4942
PUP15_1: R86.2 U90.3 U90.26 | length 1426.7
  TopLayer w6: v1(4861,3375) U90.3@4950,3375 ; v1(4725,2961) U90.26@4725,3050 v1(4725,2961)
  MidLayer5 w6: v1(4650,2410) 4650,2886 v1(4725,2961)
  MidLayer6 w6: v1(4725,2961) 4900,3136 4900,3336 v1(4861,3375)
  BottomLayer w6: R86.2@4575,2410 v1(4650,2410)
  other v1: 4725,2961
PUP15_2: U73.10 U73.13 U78.1 U78.4 | length 4365.5
  TopLayer w6: v1(3803.5,5105.5) 3825,5127 U73.10@3825,5158 ; U78.4@5050,2067 5050,2131 5018.5,2162.5 4937.5,2162.5 v1(4900,2125) ; v1(4900,2125) U78.1@4900,2067 v1(4900,2125) ; U73.13@3675,5158 v1(3675,5221.5) U73.13@3675,5158
  MidLayer4 w6: v1(3675,5221.5) 3675,4875 3900,4650 3900,4612.5 4050,4462.5 4050,3962.5 4237.5,3775 4237.5,3537.5 4400,3375 4400,3125 4487.5,3037.5 4487.5,2850 4500,2837.5 4500,2460 4822.5,2137.5 4887.5,2137.5 v1(4900,2125)
  MidLayer6 w6: v1(3675,5221.5) 3791,5105.5 v1(3803.5,5105.5)
  other v1: 3675,5221.5
PUP15_3: R89.2 U78.10 U78.12 | length 317.6
  TopLayer w6: U78.12@5000,2283 5000,2241 5003.5,2237.5 5087.5,2237.5 5100,2250 U78.10@5100,2283 v1(5100,2216)
  BottomLayer w6: v1(5100,2216) R89.2@5100,2285
PUP15_4: U77.2 U77.4 | length 181.1
  TopLayer w6: U77.2@5375,4017 5375,3977.5 5377.5,3975 5472.5,3975 5475,3977.5 U77.4@5475,4017
PUP15_5: R91.2 U77.10 U77.12 | length 370.3
  TopLayer w6: v1(5410,4135) 5425,4150 U77.12@5425,4233 5425,4272.5 5427.5,4275 5522.5,4275 5525,4272.5 U77.10@5525,4233
  BottomLayer w6: R91.2@5325,4135 v1(5410,4135)
PUP17_1: R110.2 U114.1 | length 165.5
  TopLayer w6: v1(4050,4987.5) 4097.5,4987.5 4100,4985 U114.1@4100,4943
  BottomLayer w6: R110.2@4050,4915 v1(4050,4987.5)
PUP18_1: R129.2 U126.10 U126.12 U132.10 U132.13 | length 2556
  TopLayer w6: U126.12@2150,3408 2150,3375 2162.5,3362.5 2237.5,3362.5 2250,3375 U126.10@2250,3408 2250,3469.5 v1(2262.5,3482) ; U132.10@3200,2308 v1(3200,2369.5) ; 3050,2344.5 v1(3075,2369.5) 3050,2344.5 ; 3050,2344.5 U132.13@3050,2308 3050,2344.5
  MidLayer4 w6: v1(2450,3412.5) 2737.5,3125 2737.5,2962.5 2825,2875 2825,2619.5 v1(3075,2369.5)
  MidLayer6 w6: v1(2262.5,3482) 2332,3412.5 v1(2450,3412.5) ; v1(3075,2369.5) v1(3200,2369.5)
  BottomLayer w6: v1@2447.5,3415 R129.2@2225,3415 v1@2447.5,3415 ; v1@2447.5,3415 v1(2450,3412.5) v1@2447.5,3415
  other v1: 3075,2369.5 2450,3412.5
PUP18_2: U129.9 U133.9 U139.7 U139.9 U139.10 | length 4995.1
  TopLayer w6: U139.9@4200,2117 4200,2147.5 4202.5,2150 4250,2150 U139.10@4250,2117 U139.7@4250,2332 ; v1(4434,2675) 4475,2634 U129.9@4475,2592 ; v1(6263,4625) 6275,4613 U133.9@6275,4567 ; 4250,2258 U139.7@4250,2332 ; 4250,2258 v1(4225,2258) 4250,2258 ; 4250,2258 U139.7@4250,2332
  MidLayer3 w6: v1(4434,2675) 4471.5,2637.5 4700,2637.5 4750,2687.5 4750,2875 4912.5,3037.5 4912.5,3550 5400,4037.5 5675,4037.5 5675,4325 5862.5,4512.5 5862.5,4600 5887.5,4625 v1(6263,4625)
  BottomLayer w6: 4250,2283 v1(4225,2258) 4250,2283 ; 4250,2283 4250,2491 ; 4250,2283 4250,2491 ; 4250,2491 v1(4434,2675) 4250,2491
  other v1: 4225,2258 4434,2675
PUP18_3: U126.1 U126.4 U132.1 U132.4 | length 2229.2
  TopLayer w6: U126.1@2050,3192 2050,3275 2075,3300 2166,3300 2200,3266 U126.4@2200,3192 2200,2825 v1(2225,2800) ; U132.4@3150,2092 3150,2055 3135,2040 v1(3000,2040) ; v1(3000,2040) U132.1@3000,2092 v1(3000,2040)
  MidLayer4 w6: v1(2225,2800) 2537.5,2487.5 2737.5,2487.5 2900,2325 2900,2140 v1(3000,2040)
PUP18_4: R126.2 U138.26 | length 436.8
  TopLayer w6: v1(4375,3990) U138.26@4375,4250
  BottomLayer w6: v1(4375,3990) R126.2@4500,3865
PUP91: R286.2 U263.1 U263.4 U263.10 U263.13 | length 1093.3
  TopLayer w6: U263.1@1500,3567 1500,3650 1512.5,3662.5 1600,3662.5 1650,3612.5 ; U263.13@1550,3783 1550,3750 1600,3700 1687.5,3700 v1(1700,3712.5) ; v1(1677.5,3640) 1650,3612.5 ; 1650,3612.5 U263.4@1650,3567 1650,3612.5 ; v1(1700,3712.5) U263.10@1700,3783 v1(1700,3712.5)
  MidLayer6 w6: v1(1700,3712.5) 1775,3637.5 v1(1850,3637.5)
  BottomLayer w6: v1(1677.5,3640) R286.2@1800,3640 1847.5,3640 v1(1850,3637.5)
PUP92: R287.2 U257.1 U257.4 U257.10 U257.13 | length 1208.5
  TopLayer w6: U257.1@2300,4067 2300,4100 2312.5,4112.5 2362.5,4112.5 2375,4100 2375,4030 2380,4025 2447.5,4025 2450,4027.5 U257.4@2450,4067 2450,4112.5 2509,4171.5 v1(2537.5,4171.5) ; v1(2350,4175) U257.13@2350,4283 ; 2500,4209 U257.10@2500,4283 2500,4209 ; 2500,4209 v1(2537.5,4171.5) ; 2500,4209 v1(2537.5,4171.5)
  MidLayer6 w6: v1(2350,4175) 2534,4175 v1(2537.5,4171.5)
  BottomLayer w6: 2500,4134 v1(2537.5,4171.5) 2500,4134 ; 2500,4134 R287.2@2500,4090 2500,4134
  other v1: 2537.5,4171.5 2537.5,4171.5
PWR: U8.9 U8.10 U11.8 | length 2200.7
  TopLayer w6: U8.10@850,3408 850,3377.5 852.5,3375 897.5,3375 900,3377.5 U8.9@900,3408 v1(900,3513) ; U11.8@2235,4675 v1(2300,4675)
  MidLayer5 w6: v1(900,3513) 1062.5,3675.5 1062.5,3712.5 1487.5,4137.5 1750,4137.5 1775,4162.5 1775,4187.5 2262.5,4675 v1(2300,4675)
QT0: U51.14 U59.15 | length 2314.5
  TopLayer w6: U59.15@4810,7075 v1(4950,7075) ; v1(6575,8211) U51.14@6575,8290
  MidLayer5 w6: v1(4950,7075) 5175,7300 5462.5,7300 6075,7912.5 6276.5,7912.5 v1(6575,8211)
QT1: U51.15 U59.25 | length 2675.6
  TopLayer w6: U59.25@4400,7235 v1(4400,7312.5) ; v1(6525,8211) U51.15@6525,8290
  MidLayer5 w6: v1(4400,7312.5) 4512.5,7312.5 4762.5,7562.5 4962.5,7562.5 5162.5,7762.5 5312.5,7762.5 5600,8050 5812.5,8050 5937.5,8175 6100,8175 6162.5,8237.5 6498.5,8237.5 v1(6525,8211)
QT2: U51.16 U59.14 | length 2857.2
  TopLayer w6: U59.14@4810,7025 v1(4942,7025) ; U51.16@6475,8290 v1(6475,8362.5)
  MidLayer1 w6: v1(4942,7025) 4975,7058 4975,7900 5525,8450 6387.5,8450 v1(6475,8362.5)
QT3: U51.17 U59.19 | length 2253.7
  TopLayer w6: U59.19@4700,7235 v1(4700,7312.5) ; v1(6425,8211) U51.17@6425,8290
  MidLayer5 w6: v1(4700,7312.5) 5137.5,7312.5 5587.5,7762.5 5762.5,7762.5 6050,8050 6264,8050 v1(6425,8211)
QT4: U51.18 U59.6 | length 3067.8
  TopLayer w6: U59.6@4750,6615 v1(4750,6700) ; v1(6375,8212.5) U51.18@6375,8290
  BottomLayer w6: v1(4750,6700) 4912.5,6700 5012.5,6800 5087.5,6800 5487.5,7200 5487.5,7266.5 5496,7275 5912.5,7275 5975,7337.5 5975,7462.5 6137.5,7625 6137.5,7650 6150,7662.5 6325,7662.5 6337.5,7650 6362.5,7650 6375,7662.5 6375,7825 6387.5,7837.5 6387.5,8025 6412.5,8050 6500,8050 6512.5,8062.5 6512.5,8125 6487.5,8150 6437.5,8150 v1(6375,8212.5)
QT5: U51.19 U59.21 | length 2274.8
  TopLayer w6: U59.21@4600,7235 v1(4600,7300) ; v1(6325,8162.5) U51.19@6325,8290
  MidLayer5 w6: v1(4600,7300) 4737.5,7437.5 4937.5,7437.5 5212.5,7712.5 5425,7712.5 5712.5,8000 5937.5,8000 6100,8162.5 v1(6325,8162.5)
QT6: U51.20 U59.9 | length 2594.8
  TopLayer w6: U59.9@4810,6775 v1(4887.5,6775) ; v1(6269,8212.5) 6275,8218.5 U51.20@6275,8290
  BottomLayer w6: v1(4887.5,6775) 4887.5,6850 4925,6887.5 4984.5,6887.5 4991,6881 5055,6881 5059,6885 5059,7159 5650,7750 5812.5,7750 5887.5,7825 5950,7825 5975,7850 5975,7875 6000,7900 6000,8037.5 6112.5,8150 6112.5,8291.5 6121,8300 6181.5,8300 v1(6269,8212.5)
QT7: U51.21 U59.10 | length 2261.1
  TopLayer w6: U59.10@4810,6825 v1(4912.5,6825) ; v1(6200,8200) 6225,8225 U51.21@6225,8290
  BottomLayer w6: v1(4912.5,6825) 4956.5,6869 5062.5,6869 5075,6881.5 5075,7012.5 5112.5,7050 5125,7050 5550,7475 5650,7475 5987.5,7812.5 5987.5,7862.5 6125,8000 6162.5,8000 6187.5,8025 6187.5,8187.5 v1(6200,8200)
RACK: U113.13 U116.3 U242.6 | length 2960.7
  TopLayer w6: U242.6@3800,7342 v1(3800,7437.5) ; v1(4962.5,5625) 4975,5612.5 U113.13@4975,5440 ; U116.3@4285,5850 v1(4367,5850) U116.3@4285,5850
  MidLayer3 w6: v1(3800,7437.5) 3800,7337.5 4312.5,6825 4312.5,5904.5 v1(4367,5850)
  MidLayer6 w6: v1(4367,5850) 4592,5625 v1(4962.5,5625)
  other v1: 4367,5850
RDACK: U33.12 U83.2 U83.11 U95.27 U128.35 U242.5 | length 10625.8
  TopLayer w6: U128.35@2815,6775 v1(2950,6775) ; v1(3825,2512.5) U95.27@3825,2650 ; 3750,7305.5 U242.5@3750,7342 3750,7305.5 ; 3750,7305.5 v1(3775,7280.5) 3750,7305.5 ; 5425,4562.5 U33.12@5425,4608 5425,4562.5 ; 5425,4562.5 v1(5412.5,4550) 5425,4562.5 ; U83.2@5875,2092 v1(5875,2150) U83.2@5875,2092 ; v1(5975,2234) U83.11@5975,2308 v1(5975,2234)
  MidLayer2 w6: v1(3825,2512.5) 4187.5,2150 4725,2150 4825,2250 5312.5,2250 5362.5,2200 5687.5,2200 5737.5,2150 v1(5875,2150)
  MidLayer4 w6: v1(3775,7280.5) 3887.5,7280.5 3925,7243 3925,6837.5 4775,5987.5 4775,5962.5 4937.5,5800 4937.5,5112.5 5412.5,4637.5 v1(5412.5,4550) 5450,4512.5 5650,4512.5 5675,4487.5 5675,3637.5 6050,3262.5 6050,3050 6200,2900 6200,2787.5 6150,2737.5 6150,2409 v1(5975,2234)
  MidLayer5 w6: v1(2950,6775) 3337.5,7162.5 3725,7162.5 3775,7212.5 v1(3775,7280.5) ; v1(5875,2150) 5891,2150 v1(5975,2234)
  other v1: 5875,2150 5975,2234 5412.5,4550 3775,7280.5
RDRDY: U33.11 U128.15 | length 3861.8
  TopLayer w6: v1(3350,6987.5) 3362.5,6975 U128.15@3435,6975 ; v1(5462.5,4550) 5475,4562.5 U33.11@5475,4608
  MidLayer4 w6: v1(4612.5,6262.5) 4837.5,6037.5 4837.5,5950 5000,5787.5 5000,5537.5 5050,5487.5 5050,5037.5 5462.5,4625 v1(5462.5,4550)
  MidLayer6 w6: v1(3350,6987.5) 3350,7037.5 3362.5,7050 3425,7050 3512.5,6962.5 3537.5,6962.5 3700,6800 3750,6800 4287.5,6262.5 v1(4612.5,6262.5)
RDREQ: U95.9 U128.21 | length 5445.4
  TopLayer w6: v1(3200,7063) 3225,7088 U128.21@3225,7135 ; U95.9@3500,2375 v1(3587.5,2375)
  MidLayer3 w6: v1(3200,7063) 3200,6800 3275,6725 3575,6725 3582.5,6732.5 3650,6732.5 3662.5,6720 3662.5,5512.5 3775,5400 3775,5077.5 3800,5052.5 3800,4737.5 3775,4712.5 3775,4675 3800,4650 3800,4462.5 3750,4412.5 3750,2537.5 v1(3587.5,2375)
RF0: U125.17 U138.7 U258.19 | length 2800.4
  TopLayer w6: v1(3325,4506) U125.17@3325,4585 ; U138.7@4325,3800 v1(4325,3912.5) ; U258.19@2875,4585 v1(2875,4650) U258.19@2875,4585
  MidLayer6 w6: v1(3325,4506) 3171.75,4659.25 3137.5,4625 ; v1(4325,3912.5) 4337.5,3925 4337.5,4075 4312.5,4100 4262.5,4100 4250,4087.5 4078,4087.5 3778,4387.5 3762.5,4387.5 3625,4525 3400,4525 3225,4700 3212.5,4700 3137.5,4625 ; v1@2887.5,4650 2912.5,4625 ; v1@2887.5,4650 v1(2875,4650) v1@2887.5,4650 ; v1@2887.5,4650 2912.5,4625 ; 2912.5,4625 3137.5,4625 ; 2912.5,4625 3137.5,4625
  other v1: 2875,4650
RF1: U125.15 U138.6 U258.16 U304.2 | length 3712.9
  TopLayer w6: U304.2@2400,3567 2400,3612 v1(2413,3625) ; U138.6@4275,3800 v1(4275,3887.5) ; v1(2725,4663) 2774.5,4712.5 3137.5,4712.5 3162.5,4737.5 3200,4737.5 3200,4687.5 v1(3225,4662.5) ; v1(2725,4663) U258.16@2725,4585 v1(2725,4663) ; v1(3225,4662.5) U125.15@3225,4585 v1(3225,4662.5)
  MidLayer1 w6: v1(2413,3625) 2475,3687 2475,3812.5 2575,3912.5 2575,4187 2600.5,4212.5 2695.5,4212.5 2725,4242 v1(2725,4663)
  MidLayer6 w6: v1(3225,4662.5) 3437.5,4450 3625,4450 3800,4275 3872.5,4275 4072.5,4075 4200,4075 4250,4025 4250,3912.5 v1(4275,3887.5)
RF2: U125.13 U138.5 U258.15 | length 2279.4
  TopLayer w6: v1(2650,4687.5) 2675,4662.5 U258.15@2675,4585 ; U138.5@4225,3800 v1(4225,3912.5) ; v1(3125,4506) U125.13@3125,4585 v1(3125,4506)
  MidLayer6 w6: v1(2650,4687.5) 2700,4637.5 2726.5,4637.5 2811.5,4552.5 3078.5,4552.5 v1(3125,4506) 3194,4506 3262.5,4437.5 3487.5,4437.5 3875,4050 4087.5,4050 v1(4225,3912.5)
  other v1: 3125,4506
RF3: U125.11 U138.4 U258.12 | length 2142.7
  TopLayer w6: U258.12@2525,4585 2525,4531 2556,4500 3025,4500 U125.11@3025,4585 v1(3025,4462.5) ; v1(4061,3875) U138.4@4150,3875
  MidLayer6 w6: v1(3025,4462.5) 3537.5,3950 3986,3950 v1(4061,3875)
RF4: U125.8 U138.31 U258.9 | length 2488.8
  TopLayer w6: v1(2512.5,4900) 2525,4912.5 U258.9@2525,4965 ; U138.31@4150,4125 4212.5,4125 v1(4225,4112.5) ; 3100,4900 v1(3100,4861) 3100,4900 ; 3100,4900 3125,4925 ; 3100,4900 3125,4925 ; 3125,4925 U125.8@3125,4965 3125,4925
  MidLayer5 w6: v1(2512.5,4900) 2537.5,4925 2962.5,4925 2987.5,4900 2987.5,4875 3037.5,4825 3064,4825 v1(3100,4861)
  MidLayer6 w6: v1(3100,4861) 3411,4550 3637.5,4550 3777.5,4410 3777.5,4400 3787.5,4400 4062.5,4125 4212.5,4125 v1(4225,4112.5)
  other v1: 3100,4861
RF5: U125.6 U138.30 U258.6 U304.13 | length 3611.5
  TopLayer w6: U304.13@2400,3783 v1(2400,3862.5) ; U138.30@4150,4175 4212.5,4175 v1(4225,4162.5) ; 2675,4911 U258.6@2675,4965 2675,4911 ; 2675,4911 v1(2650,4886) 2675,4911 ; v1(3225,4886) U125.6@3225,4965 v1(3225,4886)
  MidLayer1 w6: v1(2400,3862.5) 2487.5,3862.5 2562.5,3937.5 2562.5,4275 2625,4337.5 2625,4861 v1(2650,4886)
  MidLayer6 w6: v1(2650,4886) 2673.5,4862.5 2750,4862.5 2825,4937.5 3025,4937.5 3062.5,4900 3211,4900 v1(3225,4886) 3511,4600 3662.5,4600 3750,4512.5 3787.5,4512.5 4125,4175 4212.5,4175 v1(4225,4162.5)
  other v1: 2650,4886 3225,4886
RF6: U125.4 U138.29 U258.5 | length 3356.5
  TopLayer w6: v1(2725,4888) U258.5@2725,4965 ; U125.4@3325,4965 3325,4911 v1(3350,4886) ; 4225,4400 U138.29@4225,4250 4225,4400 ; 4225,4400 v1(4237.5,4412.5) 4225,4400
  MidLayer6 w6: v1(2725,4888) 2799.5,4962.5 3100,4962.5 3137.5,4925 3311,4925 3611,4625 ; v1(3350,4886) 3611,4625 ; 3611,4625 3787.5,4625 ; 3611,4625 3787.5,4625 ; 3787.5,4625 3800,4612.5 ; 3787.5,4625 3800,4612.5 ; 3800,4612.5 3925,4612.5 ; 3800,4612.5 3925,4612.5 ; 3925,4612.5 4125,4412.5 ; 3925,4612.5 4125,4412.5 ; 4125,4412.5 v1(4237.5,4412.5) 4125,4412.5
  other v1: 4237.5,4412.5
RF7: U125.2 U138.28 U258.2 U304.3 | length 4442.5
  TopLayer w6: U304.3@2450,3567 2450,3600 v1(2500,3650) ; U125.2@3425,4965 3425,4925 3450,4900 3450,4850 3368.75,4768.75 3337.5,4800 ; U138.28@4275,4250 4275,4198.5 4272.5,4196 4202.5,4196 4202.5,4435 4175,4462.5 4175,4487.5 4087.5,4575 3562.5,4575 3337.5,4800 ; v1(2875,4900) U258.2@2875,4965 ; v1(2875,4900) 2975,4800 ; v1(2875,4900) U258.2@2875,4965 ; v1(2875,4900) 2975,4800 ; v1(2875,4900) U258.2@2875,4965 ; 2975,4800 3337.5,4800 ; 2975,4800 3337.5,4800
  MidLayer1 w6: v1(2500,3650) 2587.5,3737.5 2587.5,4175 2600,4187.5 2687.5,4187.5 2850,4350 2850,4675 2875,4700 v1(2875,4900)
RFD0: U82.11 U93.3 U130.19 | length 4336.5
  TopLayer w6: U130.19@4200,2885 v1(4200,2987.5) ; v1(6500,2208) U93.3@6500,2282 ; 6100,3688 U82.11@6100,3740 6100,3688 ; 6100,3688 v1@6113,3675 ; 6100,3688 v1@6113,3675 ; v1@6113,3674 v1@6113,3675 ; v1@6113,3674 v1(6112.5,3673.5) v1@6113,3674 ; v1@6113,3674 v1@6113,3675
  MidLayer2 w6: v1(4200,2987.5) 4200,3187.5 4562.5,3550 5000,3550 5100,3650 5209,3650 5225,3666 5225,3687.5 5237.5,3700 5375,3700 5387.5,3712.5 6073.5,3712.5 v1(6112.5,3673.5)
  MidLayer3 w6: v1(6112.5,3673.5) 6275,3511 6275,3037.5 6237.5,3000 6237.5,2600 6500,2337.5 v1(6500,2208)
  other v1: 6112.5,3673.5
RFD1: U82.12 U93.4 U130.18 | length 4292.4
  TopLayer w6: U130.18@4150,2885 v1(4150,2975) ; v1(6450,2208) U93.4@6450,2282 ; v1(6050,3648.5) U82.12@6050,3740 v1(6050,3648.5)
  MidLayer3 w6: v1(6050,3648.5) 6112.5,3586 6112.5,2612.5 6450,2275 v1(6450,2208)
  MidLayer5 w6: v1(4150,2975) 4200,3025 5400,3025 5475,3100 5475,3175 5725,3425 6025,3425 6050,3450 v1(6050,3648.5)
  other v1: 6050,3648.5
RFD2: U82.13 U93.5 U130.17 | length 4263.1
  TopLayer w6: U130.17@4100,2885 v1(4100,3012.5) ; v1(6000,3462.5) U82.13@6000,3740 v1(6000,3575) ; v1(6400,2208) U93.5@6400,2282
  MidLayer4 w6: v1(6000,3575) 6125,3450 6125,3162.5 6225,3062.5 6225,3012.5 6237.5,3000 6237.5,2650 6337.5,2550 6337.5,2270.5 v1(6400,2208)
  MidLayer5 w6: v1(4100,3012.5) 4125,3037.5 5265,3037.5 5415,3187.5 5450,3187.5 5725,3462.5 v1(6000,3462.5)
RFD3: U82.14 U93.6 U130.16 | length 4261.8
  TopLayer w6: U130.16@4050,2885 v1(4050,3025) ; v1(6350,2183) U93.6@6350,2282 ; v1(5950,3675) U82.14@5950,3740 v1(5950,3675)
  MidLayer4 w6: v1(5950,3675) 5950,3475 6075,3350 6075,3100 6225,2950 6225,2612.5 6325,2512.5 6325,2208 v1(6350,2183)
  MidLayer5 w6: v1(4050,3025) 4075,3050 5212.5,3050 5700,3537.5 5925,3537.5 5950,3562.5 v1(5950,3675)
  other v1: 5950,3675
RFD4: U82.15 U88.3 U130.15 | length 3907.7
  TopLayer w6: U130.15@4000,2885 4000,2800 v1(4025,2775) ; v1(5925,2562.5) U88.3@5925,2632 ; v1(5900,3637.5) U82.15@5900,3740 v1(5900,3637.5)
  MidLayer3 w6: v1(5900,3637.5) 5975,3562.5 5975,2612.5 v1(5925,2562.5)
  MidLayer5 w6: v1(4025,2775) 4025,3037.5 4050,3062.5 4512.5,3062.5 4850,3400 5512.5,3400 5662.5,3550 5812.5,3550 v1(5900,3637.5)
  other v1: 5900,3637.5
RFD5: U82.16 U88.4 U130.14 | length 3450.6
  TopLayer w6: U130.14@3950,2885 3950,2775 v1(4025,2700) ; v1(5850,3675) U82.16@5850,3740 ; 5875,2583 U88.4@5875,2632 5875,2583 ; 5875,2583 v1(5850,2558) 5875,2583
  MidLayer1 w6: v1(5850,2558) v1(5850,3675)
  MidLayer3 w6: v1(4025,2700) 4100,2625 5783,2625 v1(5850,2558)
  other v1: 5850,2558
RFD6: U82.17 U88.5 U130.13 | length 3861.9
  TopLayer w6: v1(3900,2800) U130.13@3900,2885 ; v1(5800,2558) 5825,2583 U88.5@5825,2632 ; v1(5800,3600) U82.17@5800,3740 v1(5800,3662.5)
  MidLayer1 w6: v1(5800,2558) v1(5800,3662.5)
  MidLayer5 w6: v1(3900,2800) 4012.5,2912.5 4012.5,3050 4037.5,3075 4475,3075 4737.5,3337.5 4737.5,3437.5 4762.5,3462.5 5275,3462.5 5412.5,3600 v1(5800,3600)
RFD7: U82.18 U88.6 U130.12 | length 3644.3
  TopLayer w6: v1(3850,2825) U130.12@3850,2885 ; v1(5750,3675) U82.18@5750,3740 ; 5750,2575 5775,2600 ; 5750,2575 v1(5750,2558) 5750,2575 ; 5750,2575 5775,2600 ; 5775,2600 U88.6@5775,2632 5775,2600
  MidLayer1 w6: v1(5750,2558) 5750,3550 5762.5,3562.5 5762.5,3662.5 v1(5750,3675)
  MidLayer5 w6: v1(3850,2825) 3862.5,2812.5 3862.5,2750 4250,2362.5 5337.5,2362.5 5550,2575 5733,2575 v1(5750,2558)
  other v1: 5750,2558
RFD8: U80.11 U96.3 U134.19 | length 4930.1
  TopLayer w6: U134.19@3600,2910 3600,2875 3612.5,2875 v1(3612.5,2812.5) ; v1(6550,3613) 6625,3688 U80.11@6625,3740 ; U96.3@6500,2632 v1(6500,2706) U96.3@6500,2632
  MidLayer2 w6: v1(3612.5,2812.5) 3500,2812.5 3462.5,2850 3437.5,2850 3425,2837.5 3425,2775 3587.5,2612.5 3775,2612.5 3875,2512.5 4775,2512.5 4925,2662.5 6000,2662.5 6050,2712.5 6100,2712.5 6162.5,2650 6444,2650 v1(6500,2706)
  MidLayer3 w6: v1(6500,2706) 6550,2756 v1(6550,3613)
  other v1: 6500,2706
RFD9: U80.12 U96.4 U134.18 | length 4314.9
  TopLayer w6: U134.18@3550,2910 3550,2865 3565,2850 v1(3581.5,2850) ; v1(6550,3663) 6575,3688 U80.12@6575,3740 ; U96.4@6450,2632 v1(6450,2706) U96.4@6450,2632
  MidLayer1 w6: v1(6450,2706) 6500,2756 6500,3613 v1(6550,3663)
  MidLayer2 w6: v1(3581.5,2850) 3594,2862.5 4885,2862.5 4912.5,2890 5260,2890 5387.5,2762.5 6326,2762.5 6375,2713.5 6375,2694 6394,2675 6419,2675 v1(6450,2706)
  other v1: 6450,2706
RFD10: U80.13 U96.5 U134.17 | length 4370.4
  TopLayer w6: U134.17@3500,2910 3500,2862.5 v1(3512.5,2850) ; v1(6500,3650) 6500,3663 6525,3688 U80.13@6525,3740 ; U96.5@6400,2632 v1(6400,2706) U96.5@6400,2632
  MidLayer1 w6: v1(6400,2706) 6400,3337.5 6487.5,3425 6487.5,3637.5 v1(6500,3650)
  MidLayer2 w6: v1(3512.5,2850) 3550,2887.5 4762.5,2887.5 4875,3000 5412.5,3000 5612.5,2800 6306,2800 v1(6400,2706)
  other v1: 6400,2706
RFD11: U80.14 U96.6 U134.16 | length 4337
  TopLayer w6: v1(3450,2818.5) U134.16@3450,2910 ; v1(6450,3663) 6475,3688 U80.14@6475,3740 ; U96.6@6350,2632 v1(6350,2693.5) U96.6@6350,2632
  MidLayer1 w6: v1(6350,2693.5) 6375,2718.5 6375,2998.5 6350,3023.5 6350,3073.5 6387.5,3111 6387.5,3600.5 v1(6450,3663)
  MidLayer2 w6: v1(3450,2818.5) 3481,2787.5 3637.5,2787.5 3700,2850 4987.5,2850 5100,2737.5 6306,2737.5 v1(6350,2693.5)
  other v1: 6350,2693.5
RFD12: U43.11 U43.18 U80.15 | length 2809.7
  TopLayer w6: v1(6400,3663) 6425,3688 U80.15@6425,3740 ; U43.11@6625,5615 6625,5500 6600,5475 6311,5475 v1(6275,5511) ; v1(6275,5511) U43.18@6275,5615 v1(6275,5511)
  MidLayer3 w6: v1(6275,5511) 6387.5,5398.5 6387.5,5162.5 6550,5000 6550,4112.5 6525,4087.5 6525,3788 v1(6400,3663)
RFD13: U43.13 U43.16 U80.16 | length 2210.8
  TopLayer w6: U80.16@6375,3740 v1(6375,3819) ; U43.13@6525,5615 6525,5537.5 6500,5512.5 6400.5,5512.5 v1(6375,5538) ; v1(6375,5538) U43.16@6375,5615 v1(6375,5538)
  MidLayer1 w6: v1(6375,3819) 6387.5,3831.5 6387.5,5525.5 v1(6375,5538)